# EAGLE board treiber 4x (EAGLE 7.5.0)
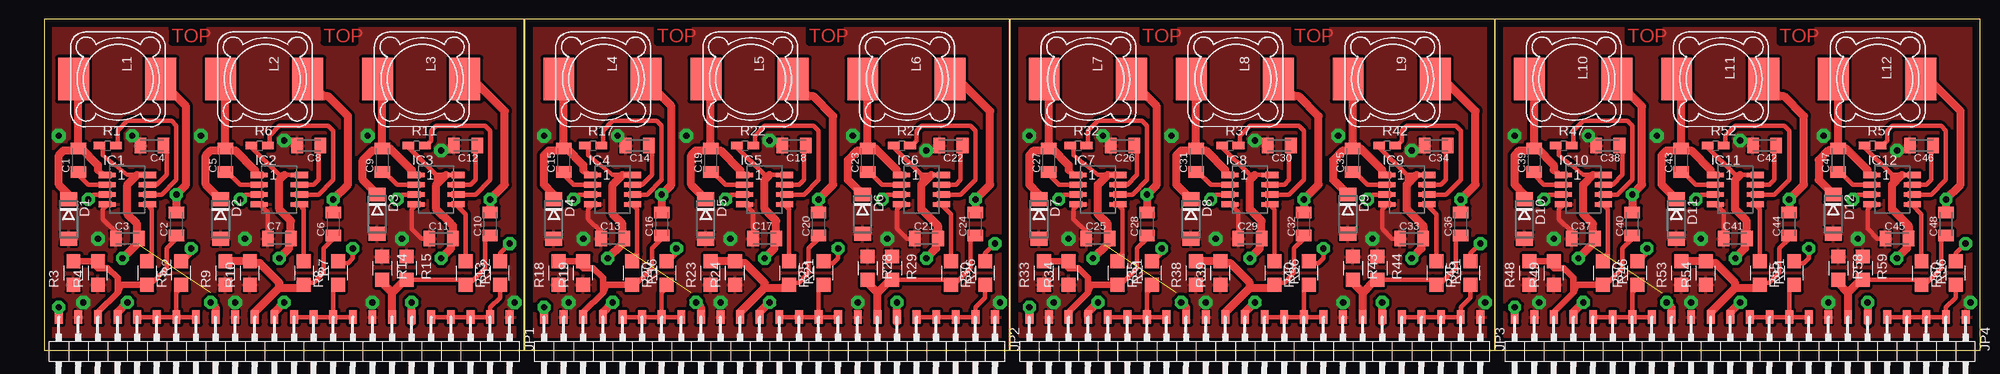
[diagram p0: board, top side]
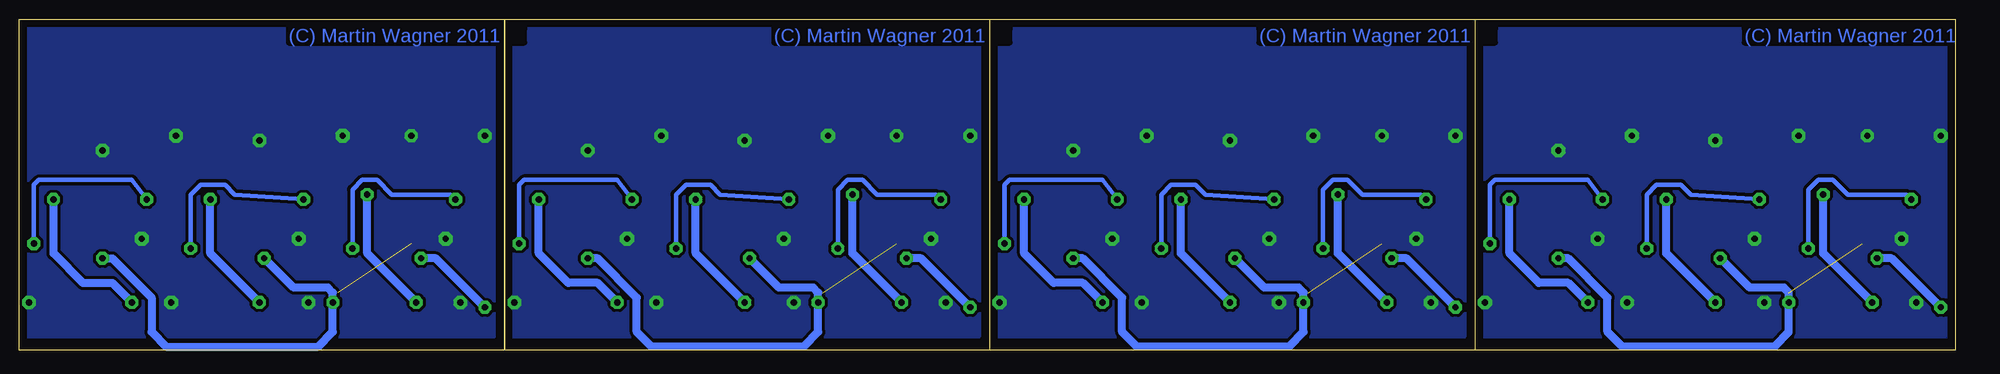
[diagram p1: board, bottom side, seen from below]

Size 250.81 x 42.85 mm. Coordinates in mm from the lower left corner, seen from the top.
Outline: 0,0 62.21,0 62.21,42.85 0,42.85 0,0
Outline: 62.23,0 125.07,0 125.07,42.85 62.23,42.85 62.23,0
Outline: 125.09,0 187.94,0 187.94,42.85 125.09,42.85 125.09,0
Outline: 187.96,0 250.81,0 250.81,42.85 187.96,42.85 187.96,0
Copper layers (1*16): Top 0.035mm / dielectric 1.5mm / Bottom 0.035mm
Design rules "smd": minimum track width 10mil, minimum drill 5mil, track to track 0.4mm, track to pad 0.4mm, pad to pad 0.3mm, via to via 0.3mm, smd to smd 8mil, copper to edge 40mil, drill to drill 8mil, minimum pad ring 10mil, minimum via ring 8mil, stop-mask expansion 4mil, vias tented up to drill 0mil, thermal gap 10mil

## Footprints (pad centres in the part's own frame; a part is rotated, then mirrored left to right if it is on the bottom)
C1206K = smd 1.5 x 2: 1 -1.5,0; 2 1.5,0
DO214AA = smd 1.8 x 2.2: A 2.55,0; C -2.55,0
SOP08 = smd 0.6 x 2.2: 1 -1.905,-2.6; 2 -0.635,-2.6; 3 0.635,-2.6; 4 1.905,-2.6; 5 1.905,2.6; 6 0.635,2.6; 7 -0.635,2.6; 8 -1.905,2.6 | smd 0.813 x 1.676: P$1 -1.905,2.87; P$2 -0.635,2.87; P$3 0.635,2.87; P$4 1.905,2.87; P$5 1.905,-2.87; P$6 0.635,-2.87; P$7 -0.635,-2.87; P$8 -1.905,-2.87
1X24SMD/90 = smd 1.016 x 1.778: 1 -1.27,-5.08; 2 1.27,-5.08; 3 3.81,-5.08; 4 6.35,-5.08; 5 8.89,-5.08; 6 11.43,-5.08; 7 13.97,-5.08; 8 16.51,-5.08; 9 19.05,-5.08; 10 21.59,-5.08; 11 24.13,-5.08; 12 26.67,-5.08; 13 29.21,-5.08; 14 31.75,-5.08; 15 34.29,-5.08; 16 36.83,-5.08; 17 39.37,-5.08; 18 41.91,-5.08; 19 44.45,-5.08; 20 46.99,-5.08; 21 49.53,-5.08; 22 52.07,-5.08; 23 54.61,-5.08; 24 57.15,-5.08
PIS = smd 5.5 x 4: P$1 6,-0.75; P$2 6,-12.044
R0805W = smd 1.5 x 1: 1 -1.052,0; 2 1.052,0
R1210W = smd 1.8 x 1.8: 1 -1.499,0; 2 1.499,0

## Placement (x,y rotation side)
C1  10n  [C1206K]  4.44,24.6 90 top
C2  470n  [C1206K]  17.14,16.34 90 top
C3  2µ2  [C1206K]  10.79,14.44 0 top
C4  100n  [C1206K]  13.97,26.5 180 top
C5  10n  [C1206K]  23.49,24.6 90 top
C6  470n  [C1206K]  37.46,16.34 90 top
C7  2µ2  [C1206K]  30.47,14.44 0 top
C8  100n  [C1206K]  34.29,26.5 180 top
C9  10n  [C1206K]  43.81,24.6 90 top
C10  470n  [C1206K]  57.78,16.34 90 top
C11  2µ2  [C1206K]  51.43,14.44 0 top
C12  100n  [C1206K]  54.61,26.5 180 top
C13  2µ2  [C1206K]  73.66,14.44 0 top
C14  100n  [C1206K]  76.83,26.5 180 top
C15  10n  [C1206K]  67.3,24.6 90 top
C16  470n  [C1206K]  80,16.34 90 top
C17  2µ2  [C1206K]  93.34,14.44 0 top
C18  100n  [C1206K]  97.15,26.5 180 top
C19  10n  [C1206K]  86.35,24.6 90 top
C20  470n  [C1206K]  100.32,16.34 90 top
C21  2µ2  [C1206K]  114.3,14.44 0 top
C22  100n  [C1206K]  117.47,26.5 180 top
C23  10n  [C1206K]  106.67,24.6 90 top
C24  470n  [C1206K]  120.64,16.34 90 top
C25  2µ2  [C1206K]  136.52,14.44 0 top
C26  100n  [C1206K]  139.69,26.5 180 top
C27  10n  [C1206K]  130.17,24.6 90 top
C28  470n  [C1206K]  142.87,16.34 90 top
C29  2µ2  [C1206K]  156.2,14.44 0 top
C30  100n  [C1206K]  160.01,26.5 180 top
C31  10n  [C1206K]  149.22,24.6 90 top
C32  470n  [C1206K]  163.19,16.34 90 top
C33  2µ2  [C1206K]  177.16,14.44 0 top
C34  100n  [C1206K]  180.34,26.5 180 top
C35  10n  [C1206K]  169.54,24.6 90 top
C36  470n  [C1206K]  183.51,16.34 90 top
C37  2µ2  [C1206K]  199.38,14.44 0 top
C38  100n  [C1206K]  202.56,26.5 180 top
C39  10n  [C1206K]  193.03,24.6 90 top
C40  470n  [C1206K]  205.73,16.34 90 top
C41  2µ2  [C1206K]  219.07,14.44 0 top
C42  100n  [C1206K]  222.88,26.5 180 top
C43  10n  [C1206K]  212.09,24.6 90 top
C44  470n  [C1206K]  226.06,16.34 90 top
C45  2µ2  [C1206K]  240.03,14.44 0 top
C46  100n  [C1206K]  243.2,26.5 180 top
C47  10n  [C1206K]  232.41,24.6 90 top
C48  470n  [C1206K]  246.38,16.34 90 top
D1  MBRS 1100  [DO214AA]  3.17,16.98 270 top
D2  MBRS 1100  [DO214AA]  22.86,16.98 270 top
D3  MBRS 1100  [DO214AA]  43.18,17.61 270 top
D4  MBRS 1100  [DO214AA]  66.03,16.98 270 top
D5  MBRS 1100  [DO214AA]  85.72,16.98 270 top
D6  MBRS 1100  [DO214AA]  106.04,17.61 270 top
D7  MBRS 1100  [DO214AA]  128.9,16.98 270 top
D8  MBRS 1100  [DO214AA]  148.59,16.98 270 top
D9  MBRS 1100  [DO214AA]  168.91,17.61 270 top
D10  MBRS 1100  [DO214AA]  191.76,16.98 270 top
D11  MBRS 1100  [DO214AA]  211.45,16.98 270 top
D12  MBRS 1100  [DO214AA]  231.77,17.61 270 top
IC1  LM3402-04  [SOP08]  10.79,20.79 270 top
IC2  LM3402-04  [SOP08]  30.47,20.79 270 top
IC3  LM3402-04  [SOP08]  50.8,20.79 270 top
IC4  LM3402-04  [SOP08]  73.66,20.79 270 top
IC5  LM3402-04  [SOP08]  93.34,20.79 270 top
IC6  LM3402-04  [SOP08]  113.66,20.79 270 top
IC7  LM3402-04  [SOP08]  136.52,20.79 270 top
IC8  LM3402-04  [SOP08]  156.2,20.79 270 top
IC9  LM3402-04  [SOP08]  176.53,20.79 270 top
IC10  LM3402-04  [SOP08]  199.38,20.79 270 top
IC11  LM3402-04  [SOP08]  219.07,20.79 270 top
IC12  LM3402-04  [SOP08]  239.39,20.79 270 top
JP1  [1X24SMD/90]  59.05,-0.8 180 top
JP2  [1X24SMD/90]  121.91,-0.8 180 top
JP3  [1X24SMD/90]  184.78,-0.8 180 top
JP4  [1X24SMD/90]  247.64,-0.8 180 top
L1  [PIS]  15.87,41.11 270 top
L2  [PIS]  34.92,41.11 270 top
L3  [PIS]  55.24,41.11 270 top
L4  [PIS]  78.73,41.11 270 top
L5  [PIS]  97.78,41.11 270 top
L6  [PIS]  118.1,41.11 270 top
L7  [PIS]  141.6,41.11 270 top
L8  [PIS]  160.65,41.11 270 top
L9  [PIS]  180.97,41.11 270 top
L10  [PIS]  204.47,41.11 270 top
L11  [PIS]  223.51,41.11 270 top
L12  [PIS]  243.84,41.11 270 top
R1  240k  [R0805W]  8.25,26.5 0 top
R2  1k  [R1210W]  13.33,10 270 top
R3  1R  [R1210W]  3.8,10 90 top
R4  1R  [R1210W]  6.98,10 90 top
R5  1k  [R1210W]  17.77,10 90 top
R6  240k  [R0805W]  27.93,26.5 0 top
R7  1k  [R1210W]  33.65,10 270 top
R8  1k  [R1210W]  38.1,10 90 top
R9  1R  [R1210W]  23.49,10 90 top
R10  1R  [R1210W]  26.66,10 90 top
R11  240k  [R0805W]  48.26,26.5 0 top
R12  1k  [R1210W]  54.61,10 270 top
R13  1k  [R1210W]  59.05,10 90 top
R14  1R  [R1210W]  43.81,10.63 270 top
R15  1R  [R1210W]  46.98,10.63 270 top
R16  1k  [R1210W]  76.19,10 270 top
R17  240k  [R0805W]  71.11,26.5 0 top
R18  1R  [R1210W]  66.67,10 90 top
R19  1R  [R1210W]  69.84,10 90 top
R20  1k  [R1210W]  80.64,10 90 top
R21  1k  [R1210W]  96.52,10 270 top
R22  240k  [R0805W]  90.8,26.5 0 top
R23  1R  [R1210W]  86.35,10 90 top
R24  1R  [R1210W]  89.53,10 90 top
R25  1k  [R1210W]  100.96,10 90 top
R26  1k  [R1210W]  117.47,10 270 top
R27  240k  [R0805W]  111.12,26.5 0 top
R28  1R  [R1210W]  106.67,10.63 270 top
R29  1R  [R1210W]  109.85,10.63 270 top
R30  1k  [R1210W]  121.91,10 90 top
R31  1k  [R1210W]  139.06,10 270 top
R32  240k  [R0805W]  133.98,26.5 0 top
R33  1R  [R1210W]  129.53,10 90 top
R34  1R  [R1210W]  132.71,10 90 top
R35  1k  [R1210W]  143.5,10 90 top
R36  1k  [R1210W]  159.38,10 270 top
R37  240k  [R0805W]  153.66,26.5 0 top
R38  1R  [R1210W]  149.22,10 90 top
R39  1R  [R1210W]  152.39,10 90 top
R40  1k  [R1210W]  163.82,10 90 top
R41  1k  [R1210W]  180.34,10 270 top
R42  240k  [R0805W]  173.98,26.5 0 top
R43  1R  [R1210W]  169.54,10.63 270 top
R44  1R  [R1210W]  172.72,10.63 270 top
R45  1k  [R1210W]  184.78,10 90 top
R46  1k  [R1210W]  201.92,10 270 top
R47  240k  [R0805W]  196.84,26.5 0 top
R48  1R  [R1210W]  192.4,10 90 top
R49  1R  [R1210W]  195.57,10 90 top
R50  1k  [R1210W]  206.37,10 90 top
R51  1k  [R1210W]  222.25,10 270 top
R52  240k  [R0805W]  216.53,26.5 0 top
R53  1R  [R1210W]  212.09,10 90 top
R54  1R  [R1210W]  215.26,10 90 top
R55  1k  [R1210W]  226.69,10 90 top
R56  1k  [R1210W]  243.2,10 270 top
R57  240k  [R0805W]  236.85,26.5 0 top
R58  1R  [R1210W]  232.41,10.63 270 top
R59  1R  [R1210W]  235.58,10.63 270 top
R60  1k  [R1210W]  247.64,10 90 top

## Library data of the parts
C1-C48 R1-R60 = rcl
D1-D12 = diode
IC1-IC12 L1-L12 = Martin
JP1-JP4 = pinhead-1

## Nets
GND: C3.1 C4.2 C7.1 C8.2 C11.1 C12.2 D1.A D2.A D3.A IC1.4 IC2.4 IC3.4 JP1.1 JP1.8 JP1.15 JP1.23 R3.1 R4.1 R9.1 R10.1 R14.1 R15.1
GND1: C13.1 C14.2 C17.1 C18.2 C21.1 C22.2 D4.A D5.A D6.A IC4.4 IC5.4 IC6.4 JP2.1 JP2.8 JP2.15 JP2.23 R18.1 R19.1 R23.1 R24.1 R28.1 R29.1
GND2: C25.1 C26.2 C29.1 C30.2 C33.1 C34.2 D7.A D8.A D9.A IC7.4 IC8.4 IC9.4 JP3.1 JP3.8 JP3.15 JP3.23 R33.1 R34.1 R38.1 R39.1 R43.1 R44.1
GND3: C37.1 C38.2 C41.1 C42.2 C45.1 C46.2 D10.A D11.A D12.A IC10.4 IC11.4 IC12.4 JP4.1 JP4.8 JP4.15 JP4.23 R48.1 R49.1 R53.1 R54.1 R58.1 R59.1
N$1: C14.1 IC4.7
N$2: C15.1 IC4.2
N$3: IC4.6 R17.2
N$4: JP2.17 JP2.18 JP2.19 JP2.20 R20.1
N$5: IC4.5 R16.1
N$6: C15.2 D4.C IC4.1 L4.P$2
N$7: C16.1 JP2.22 R16.2 R18.2 R19.2
N$8: C16.2 JP2.21 L4.P$1
N$9: IC4.3 R20.2
N$10: C18.1 IC5.7
N$11: C19.1 IC5.2
N$12: IC5.6 R22.2
N$13: JP2.9 JP2.10 JP2.11 JP2.12 R25.1
N$14: IC5.5 R21.1
N$15: C19.2 D5.C IC5.1 L5.P$2
N$16: C20.1 JP2.14 R21.2 R23.2 R24.2
N$17: C20.2 JP2.13 L5.P$1
N$18: IC5.3 R25.2
N$19: C22.1 IC6.7
N$20: C23.1 IC6.2
N$21: IC6.6 R27.2
N$22: IC6.5 R26.1
N$23: C23.2 D6.C IC6.1 L6.P$2
N$24: C24.1 JP2.7 R26.2 R28.2 R29.2
N$25: C24.2 JP2.6 L6.P$1
N$26: IC6.3 R30.2
N$27: JP2.2 JP2.3 JP2.4 JP2.5 R30.1
N$28: C26.1 IC7.7
N$29: C27.1 IC7.2
N$30: IC7.6 R32.2
N$31: JP3.17 JP3.18 JP3.19 JP3.20 R35.1
N$32: IC7.5 R31.1
N$33: C27.2 D7.C IC7.1 L7.P$2
N$34: C28.1 JP3.22 R31.2 R33.2 R34.2
N$35: C28.2 JP3.21 L7.P$1
N$36: IC7.3 R35.2
N$37: C30.1 IC8.7
N$38: C31.1 IC8.2
N$39: IC8.6 R37.2
N$40: JP3.9 JP3.10 JP3.11 JP3.12 R40.1
N$41: IC8.5 R36.1
N$42: C31.2 D8.C IC8.1 L8.P$2
N$43: C32.1 JP3.14 R36.2 R38.2 R39.2
N$44: C32.2 JP3.13 L8.P$1
N$45: IC8.3 R40.2
N$46: C34.1 IC9.7
N$47: C35.1 IC9.2
N$48: C4.1 IC1.7
N$49: C1.1 IC1.2
N$50: C2.1 JP1.22 R2.2 R3.2 R4.2
N$51: IC1.6 R1.2
N$52: IC9.6 R42.2
N$53: JP1.17 JP1.18 JP1.19 JP1.20 R5.1
N$54: IC9.5 R41.1
N$55: C35.2 D9.C IC9.1 L9.P$2
N$56: C36.1 JP3.7 R41.2 R43.2 R44.2
N$57: IC1.5 R2.1
N$58: C36.2 JP3.6 L9.P$1
N$59: IC9.3 R45.2
N$60: JP3.2 JP3.3 JP3.4 JP3.5 R45.1
N$61: C38.1 IC10.7
N$62: C1.2 D1.C IC1.1 L1.P$2
N$63: C2.2 JP1.21 L1.P$1
N$64: IC1.3 R5.2
N$65: C8.1 IC2.7
N$66: C5.1 IC2.2
N$67: IC2.6 R6.2
N$68: JP1.9 JP1.10 JP1.11 JP1.12 R8.1
N$69: IC2.5 R7.1
N$70: C5.2 D2.C IC2.1 L2.P$2
N$71: C6.1 JP1.14 R7.2 R9.2 R10.2
N$72: C6.2 JP1.13 L2.P$1
N$73: IC2.3 R8.2
N$74: C12.1 IC3.7
N$75: C9.1 IC3.2
N$76: IC3.6 R11.2
N$77: JP1.2 JP1.3 JP1.4 JP1.5 R13.1
N$78: IC3.5 R12.1
N$79: C9.2 D3.C IC3.1 L3.P$2
N$80: C10.1 JP1.7 R12.2 R14.2 R15.2
N$81: C10.2 JP1.6 L3.P$1
N$82: IC3.3 R13.2
N$83: C39.1 IC10.2
N$84: IC10.6 R47.2
N$85: JP4.17 JP4.18 JP4.19 JP4.20 R50.1
N$86: IC10.5 R46.1
N$87: C39.2 D10.C IC10.1 L10.P$2
N$88: C40.1 JP4.22 R46.2 R48.2 R49.2
N$89: C40.2 JP4.21 L10.P$1
N$90: IC10.3 R50.2
N$91: C42.1 IC11.7
N$92: C43.1 IC11.2
N$93: IC11.6 R52.2
N$94: JP4.9 JP4.10 JP4.11 JP4.12 R55.1
N$95: IC11.5 R51.1
N$96: C43.2 D11.C IC11.1 L11.P$2
N$97: C44.1 JP4.14 R51.2 R53.2 R54.2
N$98: C44.2 JP4.13 L11.P$1
N$99: IC11.3 R55.2
N$100: C46.1 IC12.7
N$101: C47.1 IC12.2
N$102: IC12.6 R57.2
N$103: IC12.5 R56.1
N$104: C47.2 D12.C IC12.1 L12.P$2
N$105: C48.1 JP4.7 R56.2 R58.2 R59.2
N$106: C48.2 JP4.6 L12.P$1
N$107: IC12.3 R60.2
N$108: JP4.2 JP4.3 JP4.4 JP4.5 R60.1
V+: C3.2 C7.2 C11.2 IC1.8 IC2.8 IC3.8 JP1.16 JP1.24 R1.1 R6.1 R11.1
V+1: C13.2 C17.2 C21.2 IC4.8 IC5.8 IC6.8 JP2.16 JP2.24 R17.1 R22.1 R27.1
V+2: C25.2 C29.2 C33.2 IC7.8 IC8.8 IC9.8 JP3.16 JP3.24 R32.1 R37.1 R42.1
V+3: C37.2 C41.2 C45.2 IC10.8 IC11.8 IC12.8 JP4.16 JP4.24 R47.1 R52.1 R57.1

## Tracks (layer width: path | path; a pad name or v marks a point on that pad's centre or on a via)
GND  (via drill 0.81 pad 1.68, 0.81 pad 1.78)
  Top 0.406: R3.1 3.17,8.09 | R4.1 6.98,8.09
  Top 0.61: C3.1 9.29,15.31 7.62,16.98 7.62,18.25 8.25,18.88 IC1.4 | IC2.4 27.93,18.88 28.97,17.84 C7.1 | C11.1 48.89,14.44 47.62,15.71 47.62,18.25 48.26,18.88 IC3.4
  other vias: 6.98,14.44 5.08,6.18 1.9,27.77 20.31,27.77 11.43,27.77 31.11,27.14 41.91,27.77 26.03,14.44 24.76,6.18 42.54,6.18 46.35,14.44 51.43,25.87 60.96,6.18
  pour Top: 0.63,42.38 61.59,42.38 61.59,1.74 0.63,1.74
  pour Bottom: 0.63,42.38 61.59,42.38 61.59,1.74 0.63,1.74
GND1  (via drill 0.81 pad 1.68, 0.81 pad 1.78)
  Top 0.406: R18.1 66.03,8.09 | R19.1 69.84,8.09
  Top 0.61: C13.1 72.16,15.31 70.48,16.98 70.48,18.25 71.11,18.88 IC4.4 | IC5.4 90.8,18.88 91.84,17.84 C17.1 | C21.1 111.75,14.44 110.48,15.71 110.48,18.25 111.12,18.88 IC6.4
  other vias: 69.84,14.44 67.94,6.18 64.77,27.77 83.18,27.77 74.29,27.77 93.97,27.14 104.77,27.77 88.89,14.44 87.62,6.18 105.41,6.18 109.21,14.44 114.3,25.87 123.82,6.18
  pour Top: 63.5,42.38 124.45,42.38 124.45,1.74 63.5,1.74
  pour Bottom: 63.5,42.38 124.45,42.38 124.45,1.74 63.5,1.74
GND2  (via drill 0.81 pad 1.68, 0.81 pad 1.78)
  Top 0.406: R33.1 128.9,8.09 | R34.1 132.71,8.09
  Top 0.61: C25.1 135.02,15.31 133.34,16.98 133.34,18.25 133.98,18.88 IC7.4 | IC8.4 153.66,18.88 154.7,17.84 C29.1 | C33.1 174.62,14.44 173.35,15.71 173.35,18.25 173.98,18.88 IC9.4
  other vias: 132.71,14.44 130.81,6.18 127.63,27.77 146.04,27.77 137.16,27.77 156.84,27.14 167.63,27.77 151.76,14.44 150.49,6.18 168.27,6.18 172.08,14.44 177.16,25.87 186.69,6.18
  pour Top: 126.36,42.38 187.32,42.38 187.32,1.74 126.36,1.74
  pour Bottom: 126.36,42.38 187.32,42.38 187.32,1.74 126.36,1.74
GND3  (via drill 0.81 pad 1.68, 0.81 pad 1.78)
  Top 0.406: R48.1 191.76,8.09 | R49.1 195.57,8.09
  Top 0.61: C37.1 197.88,15.31 196.21,16.98 196.21,18.25 196.84,18.88 IC10.4 | IC11.4 216.53,18.88 217.57,17.84 C41.1 | C45.1 237.48,14.44 236.22,15.71 236.22,18.25 236.85,18.88 IC12.4
  other vias: 195.57,14.44 193.67,6.18 190.5,27.77 208.91,27.77 200.02,27.77 219.7,27.14 230.5,27.77 214.62,14.44 213.35,6.18 231.13,6.18 234.94,14.44 240.03,25.87 249.55,6.18
  pour Top: 189.22,42.38 250.19,42.38 250.19,1.74 189.22,1.74
  pour Bottom: 189.22,42.38 250.19,42.38 250.19,1.74 189.22,1.74
N$1
  Top 0.61: IC4.7 77.46,21.42 78.73,22.7 78.73,25.87 78.1,26.5 C14.1
N$2
  Top 0.61: C15.1 67.3,22.7 68.57,21.42 IC4.2
N$3
  Top 0.61: 76.19,20.15 IC4.6 78.1,20.15 80,22.06 80,29.04 79.37,29.68 73.66,29.68 72.38,28.41 72.38,26.5 R17.2
N$4
  Top 0.61: JP2.20 JP2.19 JP2.18 | JP2.18 JP2.17 | R20.1 80.64,8.09 80,7.46 JP2.18
N$5
  Top 0.61: R16.1 76.19,11.9 76.83,12.54 76.83,18.25 76.19,18.88 IC4.5
N$6
  Top 0.813: IC4.1 70.48,22.7 69.84,23.33
  Top 1.016: 69.84,23.33 69.84,23.96 67.62,26.19 | 67.62,26.19 67.3,26.5 C15.2 67.3,34.12 66.67,34.76 66.69,34.78 L4.P$2 | D4.C 66.03,20.15 64.77,21.42 64.77,25.23 65.4,25.87 67.3,25.87 67.62,26.19
N$7
  Top 0.61: R16.2 76.6,8.5 78.73,10.63 78.73,13.17 80,14.44 C16.1
  Top 0.813: JP2.22 69.84,4.92 72.38,7.46 | 72.38,7.46 72.38,9.36 71.11,10.63 69.84,10.63 R19.2 66.26,11.49 66.67,11.27 R18.2 | R16.2 72.79,8.5 72.38,7.46
N$8  (via drill 0.81 pad 1.68)
  Top 1.016: L4.P$1 77.98,34.88 81.27,31.58 81.27,21.42 v80,20.15 C16.2 | v73.66,6.18 72.38,4.92 JP2.21
  Bottom 1.016: v80,20.15 80,12.54 v73.66,6.18
N$9  (via drill 0.81 pad 1.68)
  Top 0.61: IC4.3 69.21,20.15 v68.57,19.52 | R20.2 80.64,11.27 81.91,12.54 v81.91,13.17
  Bottom 0.61: v68.57,19.52 69.21,20.15 76.83,20.15 78.73,22.06 80.64,22.06 81.91,20.79 v81.91,13.17
N$10
  Top 0.61: IC5.7 97.78,21.42 98.42,22.06 98.42,25.87 99.05,26.5 C18.1
N$11
  Top 0.61: C19.1 86.35,23.33 88.26,21.42 IC5.2
N$12
  Top 0.61: IC5.6 98.42,20.15 100.32,22.06 100.32,28.41 99.69,29.04 93.34,29.04 92.07,27.77 92.07,26.5 R22.2
N$13
  Top 0.61: JP2.12 JP2.11 JP2.10 | JP2.10 JP2.9 | R25.1 100.96,8.73 100.32,8.09 JP2.10
N$14
  Top 0.61: IC5.5 95.88,18.88 96.52,18.25 R21.1
N$15
  Top 0.61: IC5.1 90.8,22.7 90.16,23.33
  Top 1.016: D5.C 83.81,21.42 83.81,25.23 84.45,25.87 86.35,25.87 | 86.35,25.87 C19.2 86.35,34.12 85.72,34.76 85.74,34.78 L5.P$2 | 86.35,25.87 87.62,25.87 90.16,23.33
N$16
  Top 0.61: C20.1 100.32,14.44 99.05,13.17 99.05,10 97.78,8.73 96.52,8.73
  Top 1.016: JP2.14 90.16,4.92 93.34,8.09 | R21.2 96.52,8.73 95.88,8.09 93.34,8.09 | 93.34,8.09 93.34,8.73 90.8,11.27 89.53,11.27 R24.2 86.58,11.49 86.35,11.27 R23.2
N$17  (via drill 0.81 pad 1.68)
  Top 1.016: L5.P$1 97.03,34.88 99.05,32.85 99.69,32.85 102.23,30.31 102.23,21.42 v100.32,19.52 C20.2 | v93.97,6.18 92.7,4.92 JP2.13
  Bottom 1.016: v100.32,19.52 100.32,12.54 v93.97,6.18
N$18  (via drill 0.81 pad 1.68)
  Top 0.61: v102.86,13.17 102.86,11.9 102.23,11.27 100.96,11.27 R25.2 | v88.26,19.52 88.89,20.15 IC5.3 90.8,20.15
  Bottom 0.61: v88.26,19.52 97.15,20.15 98.42,21.42 101.59,21.42 102.86,20.15 v102.86,13.17
N$19
  Top 0.61: IC6.7 118.1,21.42 118.74,22.06 118.74,25.87 119.38,26.5 C22.1
N$20
  Top 0.61: C23.1 106.67,23.33 108.58,21.42 IC6.2
N$21
  Top 0.61: IC6.6 118.74,20.15 120.64,22.06 120.64,28.41 120.01,29.04 113.66,29.04 113.02,28.41 113.02,27.14 112.39,26.5 R27.2
N$22
  Top 0.61: IC6.5 116.2,18.88 117.47,17.61 R26.1
N$23
  Top 0.61: IC6.1 111.12,22.7 110.48,23.33
  Top 1.016: D6.C 104.13,22.06 104.13,24.6 105.41,25.87 106.67,25.87 | 106.67,25.87 C23.2 107.71,26.1 110.48,23.33 | L6.P$2 106.06,34.78 106.04,34.76 106.67,34.12 106.67,25.87
N$24
  Top 0.61: R29.2 117.06,9.13 117.47,8.73 | R26.2 117.88,8.5 120.01,10.63 120.01,14.44 120.64,15.08 C24.1
  Top 1.016: R28.2 106.67,8.73 107.94,7.46 | JP2.7 107.94,7.46 | R29.2 109.62,9.13 107.94,7.46 | 117.47,8.73 R26.2
N$25  (via drill 0.81 pad 1.68)
  Top 1.016: L6.P$1 118.39,35.11 122.55,30.95 122.55,21.42 v120.64,19.52 C24.2 | v110.48,6.18 JP2.6 110.48,3.64
  Bottom 1.016: v110.48,6.18 113.02,8.73 116.83,8.73 120.64,12.54 v120.64,19.52
N$26  (via drill 0.81 pad 1.68)
  Top 0.61: R30.2 121.91,12.54 v123.19,13.81 | v108.58,19.52 109.21,20.15 IC6.3 111.12,20.15
  Bottom 0.61: v123.19,13.81 123.19,21.42 122.55,22.06 110.48,22.06 v108.58,19.52
N$27
  Top 0.61: JP2.5 JP2.4 JP2.3 | JP2.3 JP2.2 | JP2.3 JP2.2 | JP2.2 120.64,5.55 121.91,6.82 R30.1 121.91,8.73
N$28
  Top 0.61: IC7.7 140.33,21.42 141.6,22.7 141.6,25.87 140.97,26.5 C26.1
N$29
  Top 0.61: C27.1 130.17,22.7 131.44,21.42 IC7.2
N$30
  Top 0.61: 139.06,20.15 IC7.6 140.97,20.15 142.87,22.06 142.87,29.04 142.23,29.68 136.52,29.68 135.25,28.41 135.25,26.5 R32.2
N$31
  Top 0.61: JP3.20 JP3.19 JP3.18 | JP3.18 JP3.17 | R35.1 143.5,8.09 142.87,7.46 JP3.18
N$32
  Top 0.61: R31.1 139.06,11.9 139.69,12.54 139.69,18.25 139.06,18.88 IC7.5
N$33
  Top 0.813: IC7.1 133.34,22.7 132.71,23.33
  Top 1.016: 132.71,23.33 132.71,23.96 130.49,26.19 | 130.49,26.19 130.17,26.5 C27.2 130.17,34.12 129.53,34.76 129.56,34.78 L7.P$2 | D7.C 128.9,20.15 127.63,21.42 127.63,25.23 128.27,25.87 130.17,25.87 130.49,26.19
N$34
  Top 0.61: R31.2 139.47,8.5 141.6,10.63 141.6,13.17 142.87,14.44 C28.1
  Top 0.813: JP3.22 132.71,4.92 135.25,7.46 | 135.25,7.46 135.25,9.36 133.98,10.63 132.71,10.63 R34.2 129.13,11.49 129.53,11.27 R33.2 | R31.2 135.66,8.5 135.25,7.46
N$35  (via drill 0.81 pad 1.68)
  Top 1.016: L7.P$1 140.85,34.88 144.14,31.58 144.14,21.42 v142.87,20.15 C28.2 | v136.52,6.18 135.25,4.92 JP3.21
  Bottom 1.016: v142.87,20.15 142.87,12.54 v136.52,6.18
N$36  (via drill 0.81 pad 1.68)
  Top 0.61: IC7.3 132.07,20.15 v131.44,19.52 | R35.2 143.5,11.27 144.78,12.54 v144.78,13.17
  Bottom 0.61: v131.44,19.52 132.07,20.15 139.69,20.15 141.6,22.06 143.5,22.06 144.78,20.79 v144.78,13.17
N$37
  Top 0.61: IC8.7 160.65,21.42 161.28,22.06 161.28,25.87 161.92,26.5 C30.1
N$38
  Top 0.61: C31.1 149.22,23.33 151.12,21.42 IC8.2
N$39
  Top 0.61: IC8.6 161.28,20.15 163.19,22.06 163.19,28.41 162.56,29.04 156.2,29.04 154.94,27.77 154.94,26.5 R37.2
N$40
  Top 0.61: JP3.12 JP3.11 JP3.10 | JP3.10 JP3.9 | R40.1 163.82,8.73 163.19,8.09 JP3.10
N$41
  Top 0.61: IC8.5 158.75,18.88 159.38,18.25 R36.1
N$42
  Top 0.61: IC8.1 153.66,22.7 153.03,23.33
  Top 1.016: D8.C 148.57,19.53 146.68,21.42 146.68,25.23 147.31,25.87 149.22,25.87 | 149.22,25.87 C31.2 149.22,34.12 148.59,34.76 148.61,34.78 L8.P$2 | 149.22,25.87 150.49,25.87 153.03,23.33
N$43
  Top 0.61: C32.1 163.19,14.44 161.92,13.17 161.92,10 160.65,8.73 159.38,8.73
  Top 1.016: JP3.14 153.03,4.92 156.2,8.09 | R36.2 159.38,8.73 158.75,8.09 156.2,8.09 | 156.2,8.09 156.2,8.73 153.66,11.27 152.39,11.27 R39.2 149.45,11.49 149.22,11.27 R38.2
N$44  (via drill 0.81 pad 1.68)
  Top 1.016: L8.P$1 159.9,34.88 161.92,32.85 162.56,32.85 165.09,30.31 165.09,21.42 v163.19,19.52 C32.2 | v156.84,6.18 155.57,4.92 JP3.13
  Bottom 1.016: v163.19,19.52 163.19,12.54 v156.84,6.18
N$45  (via drill 0.81 pad 1.68)
  Top 0.61: v165.73,13.17 165.73,11.9 165.09,11.27 163.82,11.27 R40.2 | v151.12,19.52 151.76,20.15 IC8.3 153.66,20.15
  Bottom 0.61: v151.12,19.52 160.01,20.15 161.28,21.42 164.46,21.42 165.73,20.15 v165.73,13.17
N$46
  Top 0.61: IC9.7 180.97,21.42 181.6,22.06 181.6,25.87 182.24,26.5 C34.1
N$47
  Top 0.61: C35.1 169.54,23.33 171.44,21.42 IC9.2
N$48
  Top 0.61: IC1.7 14.6,21.42 15.87,22.7 15.87,25.87 15.24,26.5 C4.1
N$49
  Top 0.61: C1.1 4.44,22.7 5.71,21.42 IC1.2
N$50
  Top 0.61: R2.2 13.74,8.5 15.87,10.63 15.87,13.17 17.14,14.44 C2.1
  Top 0.813: JP1.22 6.98,4.92 9.52,7.46 | 9.52,7.46 9.52,9.36 8.25,10.63 6.98,10.63 R4.2 3.4,11.49 3.8,11.27 R3.2 | R2.2 9.93,8.5 9.52,7.46
N$51
  Top 0.61: 13.33,20.15 IC1.6 15.24,20.15 17.14,22.06 17.14,29.04 16.5,29.68 10.79,29.68 9.52,28.41 9.52,26.5 R1.2
N$52
  Top 0.61: IC9.6 181.6,20.15 183.51,22.06 183.51,28.41 182.88,29.04 176.53,29.04 175.89,28.41 175.89,27.14 175.25,26.5 R42.2
N$53
  Top 0.61: JP1.20 JP1.19 JP1.18 | JP1.18 JP1.17 | R5.1 17.77,8.09 17.14,7.46 JP1.18
N$54
  Top 0.61: IC9.5 179.06,18.88 180.34,17.61 R41.1
N$55
  Top 0.61: IC9.1 173.98,22.7 173.35,23.33
  Top 1.016: D9.C 168.89,20.16 167,22.06 167,24.6 168.27,25.87 169.54,25.87 | 169.54,25.87 C35.2 170.58,26.1 173.35,23.33 | L9.P$2 168.93,34.78 168.91,34.76 169.54,34.12 169.54,25.87
N$56
  Top 0.61: R44.2 179.93,9.13 180.34,8.73 | R41.2 180.74,8.5 182.88,10.63 182.88,14.44 183.51,15.08 C36.1
  Top 1.016: R43.2 169.54,8.73 170.81,7.46 | JP3.7 170.81,7.46 | R44.2 172.49,9.13 170.81,7.46 | 180.34,8.73 R41.2
N$57
  Top 0.61: R2.1 13.33,11.9 13.97,12.54 13.97,18.25 13.33,18.88 IC1.5
N$58  (via drill 0.81 pad 1.68)
  Top 1.016: L9.P$1 181.25,35.11 185.41,30.95 185.41,21.42 v183.51,19.52 C36.2 | v173.35,6.18 JP3.6 173.35,3.64
  Bottom 1.016: v173.35,6.18 175.89,8.73 179.7,8.73 183.51,12.54 v183.51,19.52
N$59  (via drill 0.81 pad 1.68)
  Top 0.61: R45.2 184.78,12.54 v186.05,13.81 | v171.44,19.52 172.08,20.15 IC9.3 173.98,20.15
  Bottom 0.61: v186.05,13.81 186.05,21.42 185.41,22.06 173.35,22.06 v171.44,19.52
N$60
  Top 0.61: JP3.5 JP3.4 JP3.3 | JP3.3 JP3.2 | JP3.3 JP3.2 | JP3.2 183.51,5.55 184.78,6.82 R45.1 184.78,8.73
N$61
  Top 0.61: IC10.7 203.19,21.42 204.47,22.7 204.47,25.87 203.83,26.5 C38.1
N$62
  Top 0.813: IC1.1 7.62,22.7 6.98,23.33
  Top 1.016: 6.98,23.33 6.98,23.96 4.76,26.19 | 4.76,26.19 4.44,26.5 C1.2 4.44,34.12 3.8,34.76 3.83,34.78 L1.P$2 | D1.C 3.17,20.15 1.9,21.42 1.9,25.23 2.54,25.87 4.44,25.87 4.76,26.19
N$63  (via drill 0.81 pad 1.68)
  Top 1.016: L1.P$1 15.12,34.88 18.41,31.58 18.41,21.42 v17.14,20.15 C2.2 | v10.79,6.18 9.52,4.92 JP1.21
  Bottom 1.016: v17.14,20.15 17.14,12.54 v10.79,6.18
N$64  (via drill 0.81 pad 1.68)
  Top 0.61: IC1.3 6.34,20.15 v5.71,19.52 | R5.2 17.77,11.27 19.04,12.54 v19.04,13.17
  Bottom 0.61: v5.71,19.52 6.34,20.15 13.97,20.15 15.87,22.06 17.77,22.06 19.04,20.79 v19.04,13.17
N$65
  Top 0.61: IC2.7 34.92,21.42 35.55,22.06 35.55,25.87 36.19,26.5 C8.1
N$66
  Top 0.61: C5.1 23.49,23.33 25.39,21.42 IC2.2
N$67
  Top 0.61: IC2.6 35.55,20.15 37.46,22.06 37.46,28.41 36.83,29.04 30.47,29.04 29.2,27.77 29.2,26.5 R6.2
N$68
  Top 0.61: JP1.12 JP1.11 JP1.10 | JP1.10 JP1.9 | R8.1 38.1,8.73 37.46,8.09 JP1.10
N$69
  Top 0.61: IC2.5 33.02,18.88 33.65,18.25 R7.1
N$70
  Top 0.61: IC2.1 27.93,22.7 27.3,23.33
  Top 1.016: D2.C 22.84,19.53 20.95,21.42 20.95,25.23 21.58,25.87 23.49,25.87 | 23.49,25.87 C5.2 23.49,34.12 22.86,34.76 22.88,34.78 L2.P$2 | 23.49,25.87 24.76,25.87 27.3,23.33
N$71
  Top 0.61: C6.1 37.46,14.44 36.19,13.17 36.19,10 34.92,8.73 33.65,8.73
  Top 1.016: JP1.14 27.3,4.92 30.47,8.09 | R7.2 33.65,8.73 33.02,8.09 30.47,8.09 | 30.47,8.09 30.47,8.73 27.93,11.27 26.66,11.27 R10.2 23.72,11.49 23.49,11.27 R9.2
N$72  (via drill 0.81 pad 1.68)
  Top 1.016: L2.P$1 34.17,34.88 36.19,32.85 36.83,32.85 39.37,30.31 39.37,21.42 v37.46,19.52 C6.2 | v31.11,6.18 29.84,4.92 JP1.13
  Bottom 1.016: v37.46,19.52 37.46,12.54 v31.11,6.18
N$73  (via drill 0.81 pad 1.68)
  Top 0.61: v40,13.17 40,11.9 39.37,11.27 38.1,11.27 R8.2 | v25.39,19.52 26.03,20.15 IC2.3 27.93,20.15
  Bottom 0.61: v25.39,19.52 34.29,20.15 35.55,21.42 38.73,21.42 40,20.15 v40,13.17
N$74
  Top 0.61: IC3.7 55.24,21.42 55.88,22.06 55.88,25.87 56.51,26.5 C12.1
N$75
  Top 0.61: C9.1 43.81,23.33 45.72,21.42 IC3.2
N$76
  Top 0.61: IC3.6 55.88,20.15 57.78,22.06 57.78,28.41 57.15,29.04 50.8,29.04 50.16,28.41 50.16,27.14 49.53,26.5 R11.2
N$77
  Top 0.61: JP1.5 JP1.4 JP1.3 | JP1.3 JP1.2 | JP1.3 JP1.2 | JP1.2 57.78,5.55 59.05,6.82 R13.1 59.05,8.73
N$78
  Top 0.61: IC3.5 53.34,18.88 54.61,17.61 R12.1
N$79
  Top 0.61: IC3.1 48.26,22.7 47.62,23.33
  Top 1.016: D3.C 43.16,20.16 41.27,22.06 41.27,24.6 42.54,25.87 43.81,25.87 | 43.81,25.87 C9.2 44.85,26.1 47.62,23.33 | L3.P$2 43.2,34.78 43.18,34.76 43.81,34.12 43.81,25.87
N$80
  Top 0.61: R15.2 54.2,9.13 54.61,8.73 | R12.2 55.01,8.5 57.15,10.63 57.15,14.44 57.78,15.08 C10.1
  Top 1.016: R14.2 43.81,8.73 45.08,7.46 | JP1.7 45.08,7.46 | R15.2 46.76,9.13 45.08,7.46 | 54.61,8.73 R12.2
N$81  (via drill 0.81 pad 1.68)
  Top 1.016: L3.P$1 55.53,35.11 59.69,30.95 59.69,21.42 v57.78,19.52 C10.2 | v47.62,6.18 JP1.6 47.62,3.64
  Bottom 1.016: v47.62,6.18 50.16,8.73 53.97,8.73 57.78,12.54 v57.78,19.52
N$82  (via drill 0.81 pad 1.68)
  Top 0.61: R13.2 59.05,12.54 v60.32,13.81 | v45.72,19.52 46.35,20.15 IC3.3 48.26,20.15
  Bottom 0.61: v60.32,13.81 60.32,21.42 59.69,22.06 47.62,22.06 v45.72,19.52
N$83
  Top 0.61: C39.1 193.03,22.7 194.31,21.42 IC10.2
N$84
  Top 0.61: 201.92,20.15 IC10.6 203.83,20.15 205.73,22.06 205.73,29.04 205.1,29.68 199.38,29.68 198.12,28.41 198.12,26.5 R47.2
N$85
  Top 0.61: JP4.20 JP4.19 JP4.18 | JP4.18 JP4.17 | R50.1 206.37,8.09 205.73,7.46 JP4.18
N$86
  Top 0.61: R46.1 201.92,11.9 202.56,12.54 202.56,18.25 201.92,18.88 IC10.5
N$87
  Top 0.813: IC10.1 196.21,22.7 195.57,23.33
  Top 1.016: 195.57,23.33 195.57,23.96 193.35,26.19 | 193.35,26.19 193.03,26.5 C39.2 193.03,34.12 192.4,34.76 192.42,34.78 L10.P$2 | D10.C 191.76,20.15 190.5,21.42 190.5,25.23 191.13,25.87 193.03,25.87 193.35,26.19
N$88
  Top 0.61: R46.2 202.33,8.5 204.47,10.63 204.47,13.17 205.73,14.44 C40.1
  Top 0.813: JP4.22 195.57,4.92 198.12,7.46 | 198.12,7.46 198.12,9.36 196.84,10.63 195.57,10.63 R49.2 191.99,11.49 192.4,11.27 R48.2 | R46.2 198.52,8.5 198.12,7.46
N$89  (via drill 0.81 pad 1.68)
  Top 1.016: L10.P$1 203.72,34.88 207,31.58 207,21.42 v205.73,20.15 C40.2 | v199.38,6.18 198.12,4.92 JP4.21
  Bottom 1.016: v205.73,20.15 205.73,12.54 v199.38,6.18
N$90  (via drill 0.81 pad 1.68)
  Top 0.61: IC10.3 194.94,20.15 v194.31,19.52 | R50.2 206.37,11.27 207.64,12.54 v207.64,13.17
  Bottom 0.61: v194.31,19.52 194.94,20.15 202.56,20.15 204.47,22.06 206.37,22.06 207.64,20.79 v207.64,13.17
N$91
  Top 0.61: IC11.7 223.51,21.42 224.15,22.06 224.15,25.87 224.78,26.5 C42.1
N$92
  Top 0.61: C43.1 212.09,23.33 213.99,21.42 IC11.2
N$93
  Top 0.61: IC11.6 224.15,20.15 226.06,22.06 226.06,28.41 225.42,29.04 219.07,29.04 217.8,27.77 217.8,26.5 R52.2
N$94
  Top 0.61: JP4.12 JP4.11 JP4.10 | JP4.10 JP4.9 | R55.1 226.69,8.73 226.06,8.09 JP4.10
N$95
  Top 0.61: IC11.5 221.61,18.88 222.25,18.25 R51.1
N$96
  Top 0.61: IC11.1 216.53,22.7 215.89,23.33
  Top 1.016: D11.C 209.54,21.42 209.54,25.23 210.18,25.87 212.09,25.87 | 212.09,25.87 C43.2 212.09,34.12 211.45,34.76 211.47,34.78 L11.P$2 | 212.09,25.87 213.35,25.87 215.89,23.33
N$97
  Top 0.61: C44.1 226.06,14.44 224.78,13.17 224.78,10 223.51,8.73 222.25,8.73
  Top 1.016: JP4.14 215.89,4.92 219.07,8.09 | R51.2 222.25,8.73 221.61,8.09 219.07,8.09 | 219.07,8.09 219.07,8.73 216.53,11.27 215.26,11.27 R54.2 212.31,11.49 212.09,11.27 R53.2
N$98  (via drill 0.81 pad 1.68)
  Top 1.016: L11.P$1 222.76,34.88 224.78,32.85 225.42,32.85 227.96,30.31 227.96,21.42 v226.06,19.52 C44.2 | v219.7,6.18 218.44,4.92 JP4.13
  Bottom 1.016: v226.06,19.52 226.06,12.54 v219.7,6.18
N$99  (via drill 0.81 pad 1.68)
  Top 0.61: v228.59,13.17 228.59,11.9 227.96,11.27 226.69,11.27 R55.2 | v213.99,19.52 214.62,20.15 IC11.3 216.53,20.15
  Bottom 0.61: v213.99,19.52 222.88,20.15 224.15,21.42 227.32,21.42 228.59,20.15 v228.59,13.17
N$100
  Top 0.61: IC12.7 243.84,21.42 244.47,22.06 244.47,25.87 245.1,26.5 C46.1
N$101
  Top 0.61: C47.1 232.41,23.33 234.31,21.42 IC12.2
N$102
  Top 0.61: IC12.6 244.47,20.15 246.38,22.06 246.38,28.41 245.74,29.04 239.39,29.04 238.75,28.41 238.75,27.14 238.12,26.5 R57.2
N$103
  Top 0.61: IC12.5 241.93,18.88 243.2,17.61 R56.1
N$104
  Top 0.61: IC12.1 236.85,22.7 236.22,23.33
  Top 1.016: D12.C 229.87,22.06 229.87,24.6 231.13,25.87 232.41,25.87 | 232.41,25.87 C47.2 233.44,26.1 236.22,23.33 | L12.P$2 231.79,34.78 231.77,34.76 232.41,34.12 232.41,25.87
N$105
  Top 0.61: R59.2 242.79,9.13 243.2,8.73 | R56.2 243.61,8.5 245.74,10.63 245.74,14.44 246.38,15.08 C48.1
  Top 1.016: R58.2 232.41,8.73 233.67,7.46 | 233.67,7.46 JP4.7 | R59.2 235.35,9.13 233.67,7.46 | R56.2 243.2,8.73
N$106  (via drill 0.81 pad 1.68)
  Top 1.016: L12.P$1 244.12,35.11 248.28,30.95 248.28,21.42 v246.38,19.52 C48.2 | v236.22,6.18 JP4.6 236.22,3.64
  Bottom 1.016: v236.22,6.18 238.75,8.73 242.56,8.73 246.38,12.54 v246.38,19.52
N$107  (via drill 0.81 pad 1.68)
  Top 0.61: R60.2 247.64,12.54 v248.91,13.81 | v234.31,19.52 234.94,20.15 IC12.3 236.85,20.15
  Bottom 0.61: v248.91,13.81 248.91,21.42 248.28,22.06 236.22,22.06 v234.31,19.52
N$108
  Top 0.61: JP4.5 JP4.4 JP4.3 | JP4.3 JP4.2 | JP4.3 JP4.2 | JP4.2 246.38,5.55 247.64,6.82 R60.1 247.64,8.73
V+  (via drill 0.81 pad 1.68)  (1 unrouted)
  Top 0.61: IC1.8 10.79,22.7 7.62,25.23 7.62,26.5 R1.1 | IC2.8 31.11,22.7 30.47,22.7 26.66,26.5 R6.1 | 52.07,22.7 IC3.8 50.8,22.7 | 50.8,22.7 46.98,26.5 R11.1 47.2,26.29 50.8,22.7 | 50.8,18.25 50.8,22.7 | 52.7,13.81 52.7,16.34
  Top 0.813: 12.06,22.7 IC1.8
  Top 1.016: 12.06,22.7 10.79,21.42 10.79,17.61 12.06,16.34 12.06,14.44 | 12.06,14.44 C3.2 | 12.06,14.44 12.06,13.81 v10.16,11.9 | JP1.24 v1.9,5.55 | 31.11,22.7 30.47,22.06 30.47,18.25 31.97,16.75 C7.2 31.74,14.44 31.74,13.17 v30.47,11.9 | JP1.16 22.22,5.55 v21.58,6.18 | C11.2 52.93,16.11 52.7,16.34 50.8,18.25 50.8,21.42 52.07,22.7 | 52.7,13.81 52.7,13.17 v51.43,11.9
  Bottom 1.016: v10.16,11.9 8.25,11.9 v1.9,5.55 | v30.47,11.9 26.66,8.09 22.22,8.09 21.58,7.46 v21.58,6.18 21.58,2.38 23.49,0.47 43.18,0.47 45.08,2.38 45.08,6.82 50.16,11.9 v51.43,11.9
V+1  (via drill 0.81 pad 1.68)  (1 unrouted)
  Top 0.61: IC4.8 73.66,22.7 70.48,25.23 70.48,26.5 R17.1 | IC5.8 93.97,22.7 93.34,22.7 89.53,26.5 R22.1 | 114.93,22.7 IC6.8 113.66,22.7 | 113.66,22.7 109.85,26.5 R27.1 110.07,26.29 113.66,22.7 | 113.66,18.25 113.66,22.7 | 115.56,13.81 115.56,16.34
  Top 0.813: 74.92,22.7 IC4.8
  Top 1.016: 74.92,22.7 73.66,21.42 73.66,17.61 74.92,16.34 74.92,14.44 | 74.92,14.44 C13.2 | 74.92,14.44 74.92,13.81 v73.02,11.9 | JP2.24 v64.77,5.55 | 93.97,22.7 93.34,22.06 93.34,18.25 94.84,16.75 C17.2 94.61,14.44 94.61,13.17 v93.34,11.9 | JP2.16 85.08,5.55 v84.45,6.18 | C21.2 115.8,16.11 115.56,16.34 113.66,18.25 113.66,21.42 114.93,22.7 | 115.56,13.81 115.56,13.17 v114.3,11.9
  Bottom 1.016: v73.02,11.9 71.11,11.9 v64.77,5.55 | v93.34,11.9 89.53,8.09 85.08,8.09 84.45,7.46 v84.45,6.18 84.45,2.38 86.35,0.47 106.04,0.47 107.94,2.38 107.94,6.82 113.02,11.9 v114.3,11.9
V+2  (via drill 0.81 pad 1.68)  (1 unrouted)
  Top 0.61: IC7.8 136.52,22.7 133.34,25.23 133.34,26.5 R32.1 | IC8.8 156.84,22.7 156.2,22.7 152.39,26.5 R37.1 | 177.79,22.7 IC9.8 176.53,22.7 | 176.53,22.7 172.72,26.5 R42.1 172.93,26.29 176.53,22.7 | 176.53,18.25 176.53,22.7 | 178.43,13.81 178.43,16.34
  Top 0.813: 137.79,22.7 IC7.8
  Top 1.016: 137.79,22.7 136.52,21.42 136.52,17.61 137.79,16.34 137.79,14.44 | 137.79,14.44 C25.2 | 137.79,14.44 137.79,13.81 v135.88,11.9 | JP3.24 v127.63,5.55 | 156.84,22.7 156.2,22.06 156.2,18.25 157.7,16.75 C29.2 157.47,14.44 157.47,13.17 v156.2,11.9 | JP3.16 147.95,5.55 v147.31,6.18 | C33.2 178.66,16.11 178.43,16.34 176.53,18.25 176.53,21.42 177.79,22.7 | 178.43,13.81 178.43,13.17 v177.16,11.9
  Bottom 1.016: v135.88,11.9 133.98,11.9 v127.63,5.55 | v156.2,11.9 152.39,8.09 147.95,8.09 147.31,7.46 v147.31,6.18 147.31,2.38 149.22,0.47 168.91,0.47 170.81,2.38 170.81,6.82 175.89,11.9 v177.16,11.9
V+3  (via drill 0.81 pad 1.68)  (1 unrouted)
  Top 0.61: IC10.8 199.38,22.7 196.21,25.23 196.21,26.5 R47.1 | IC11.8 219.7,22.7 219.07,22.7 215.26,26.5 R52.1 | 240.66,22.7 IC12.8 239.39,22.7 | 239.39,22.7 235.58,26.5 R57.1 235.8,26.29 239.39,22.7 | 239.39,18.25 239.39,22.7 | 241.29,16.34 241.29,13.81
  Top 0.813: 200.66,22.7 IC10.8
  Top 1.016: 200.66,22.7 199.38,21.42 199.38,17.61 200.66,16.34 200.66,14.44 | 200.66,14.44 C37.2 | 200.66,14.44 200.66,13.81 v198.75,11.9 | JP4.24 v190.5,5.55 | 219.7,22.7 219.07,22.06 219.07,18.25 220.57,16.75 C41.2 220.34,14.44 220.34,13.17 v219.07,11.9 | JP4.16 210.81,5.55 v210.18,6.18 | C45.2 241.53,16.11 241.29,16.34 239.39,18.25 239.39,21.42 240.66,22.7 | 241.29,13.81 241.29,13.17 v240.03,11.9
  Bottom 1.016: v198.75,11.9 196.84,11.9 v190.5,5.55 | v219.07,11.9 215.26,8.09 210.81,8.09 210.18,7.46 v210.18,6.18 210.18,2.38 212.09,0.47 231.77,0.47 233.67,2.38 233.67,6.82 238.75,11.9 v240.03,11.9

## Text on the board
Top: TOP | TOP | TOP | TOP | TOP | TOP | TOP | TOP
Bottom: (C) Martin Wagner 2011 | (C) Martin Wagner 2011 | (C) Martin Wagner 2011 | (C) Martin Wagner 2011